# Altium PCB INC-FBTMC429-V1.pcbdoc
Units mil, origin at the board's own origin, x right, y up, seen from the top; angles counter-clockwise.
Board outline 3917.5 x 2962.5 mil, 2 copper layers (Top Layer, Bottom Layer); 58 components, 78 nets, 202 pads, 9 vias.
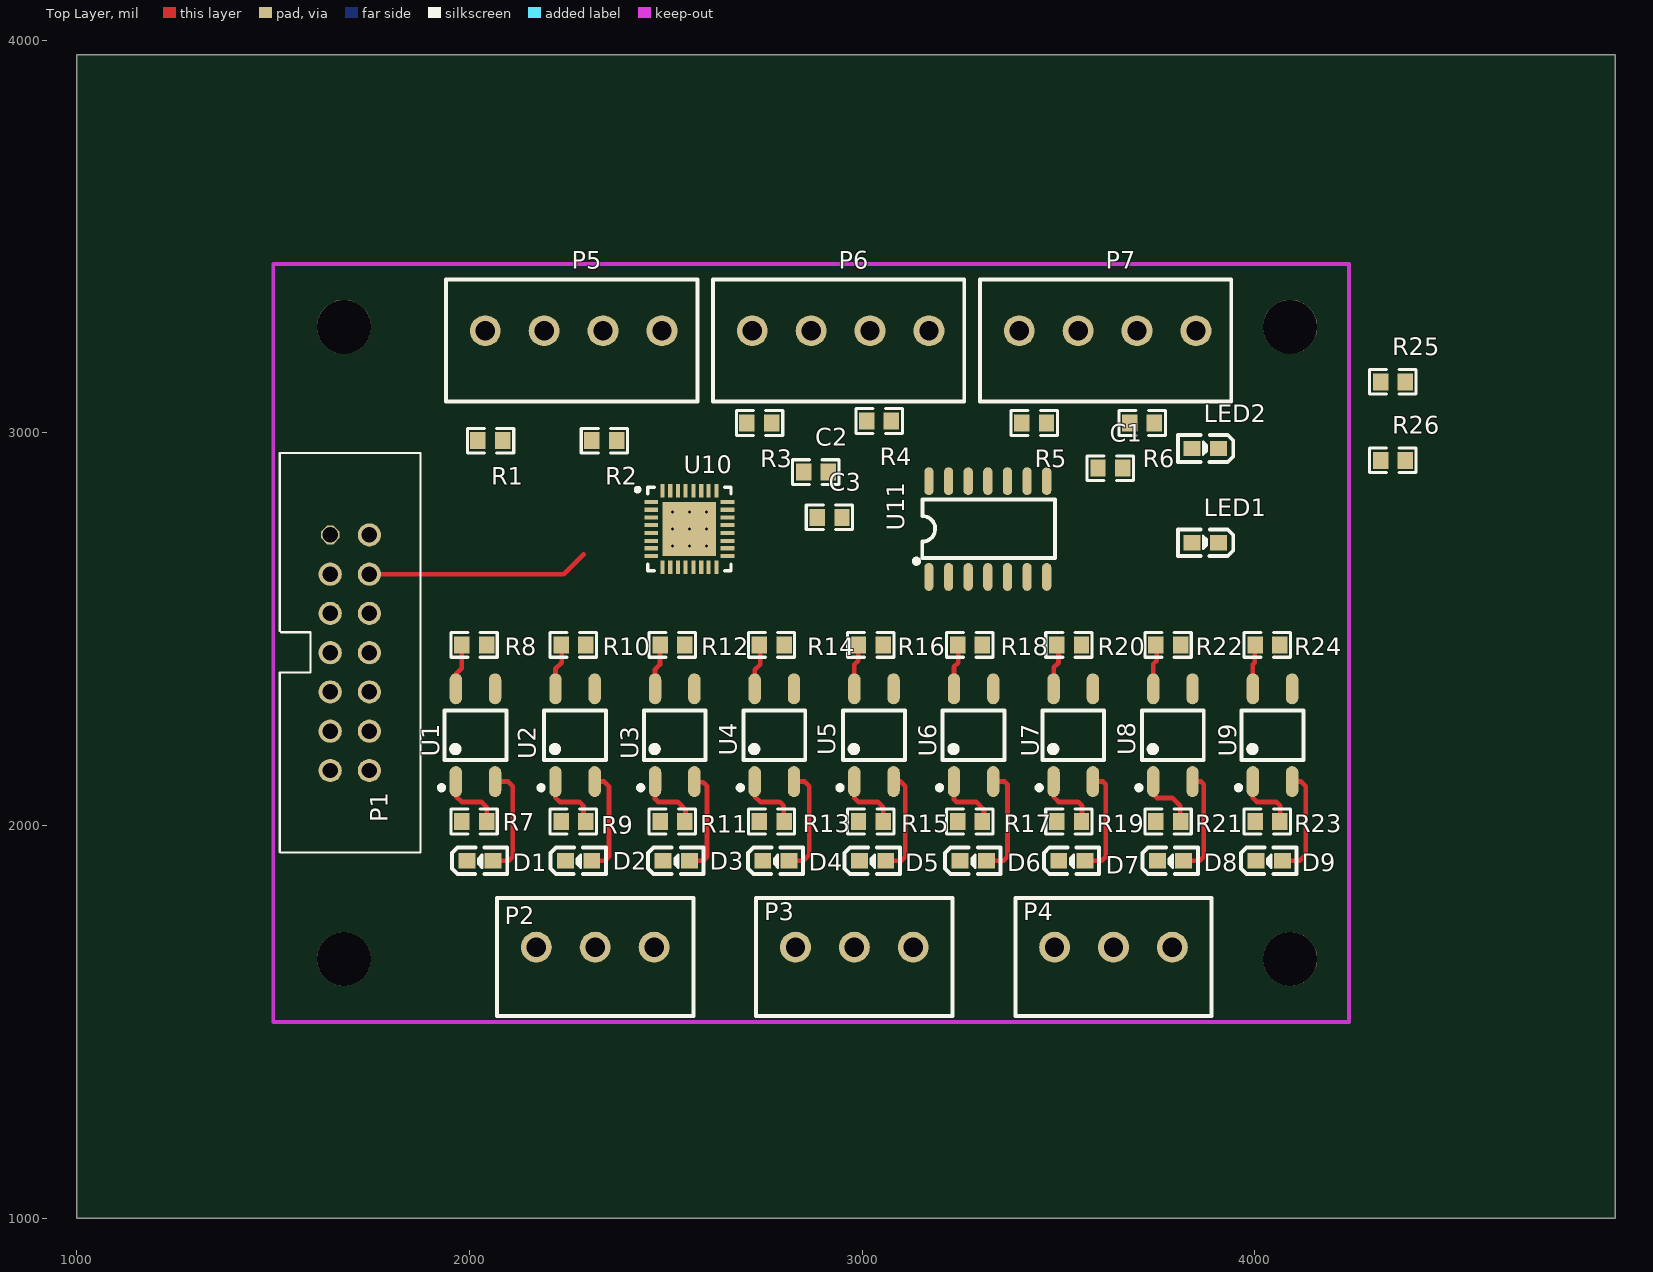
[diagram p0: Top Layer view]
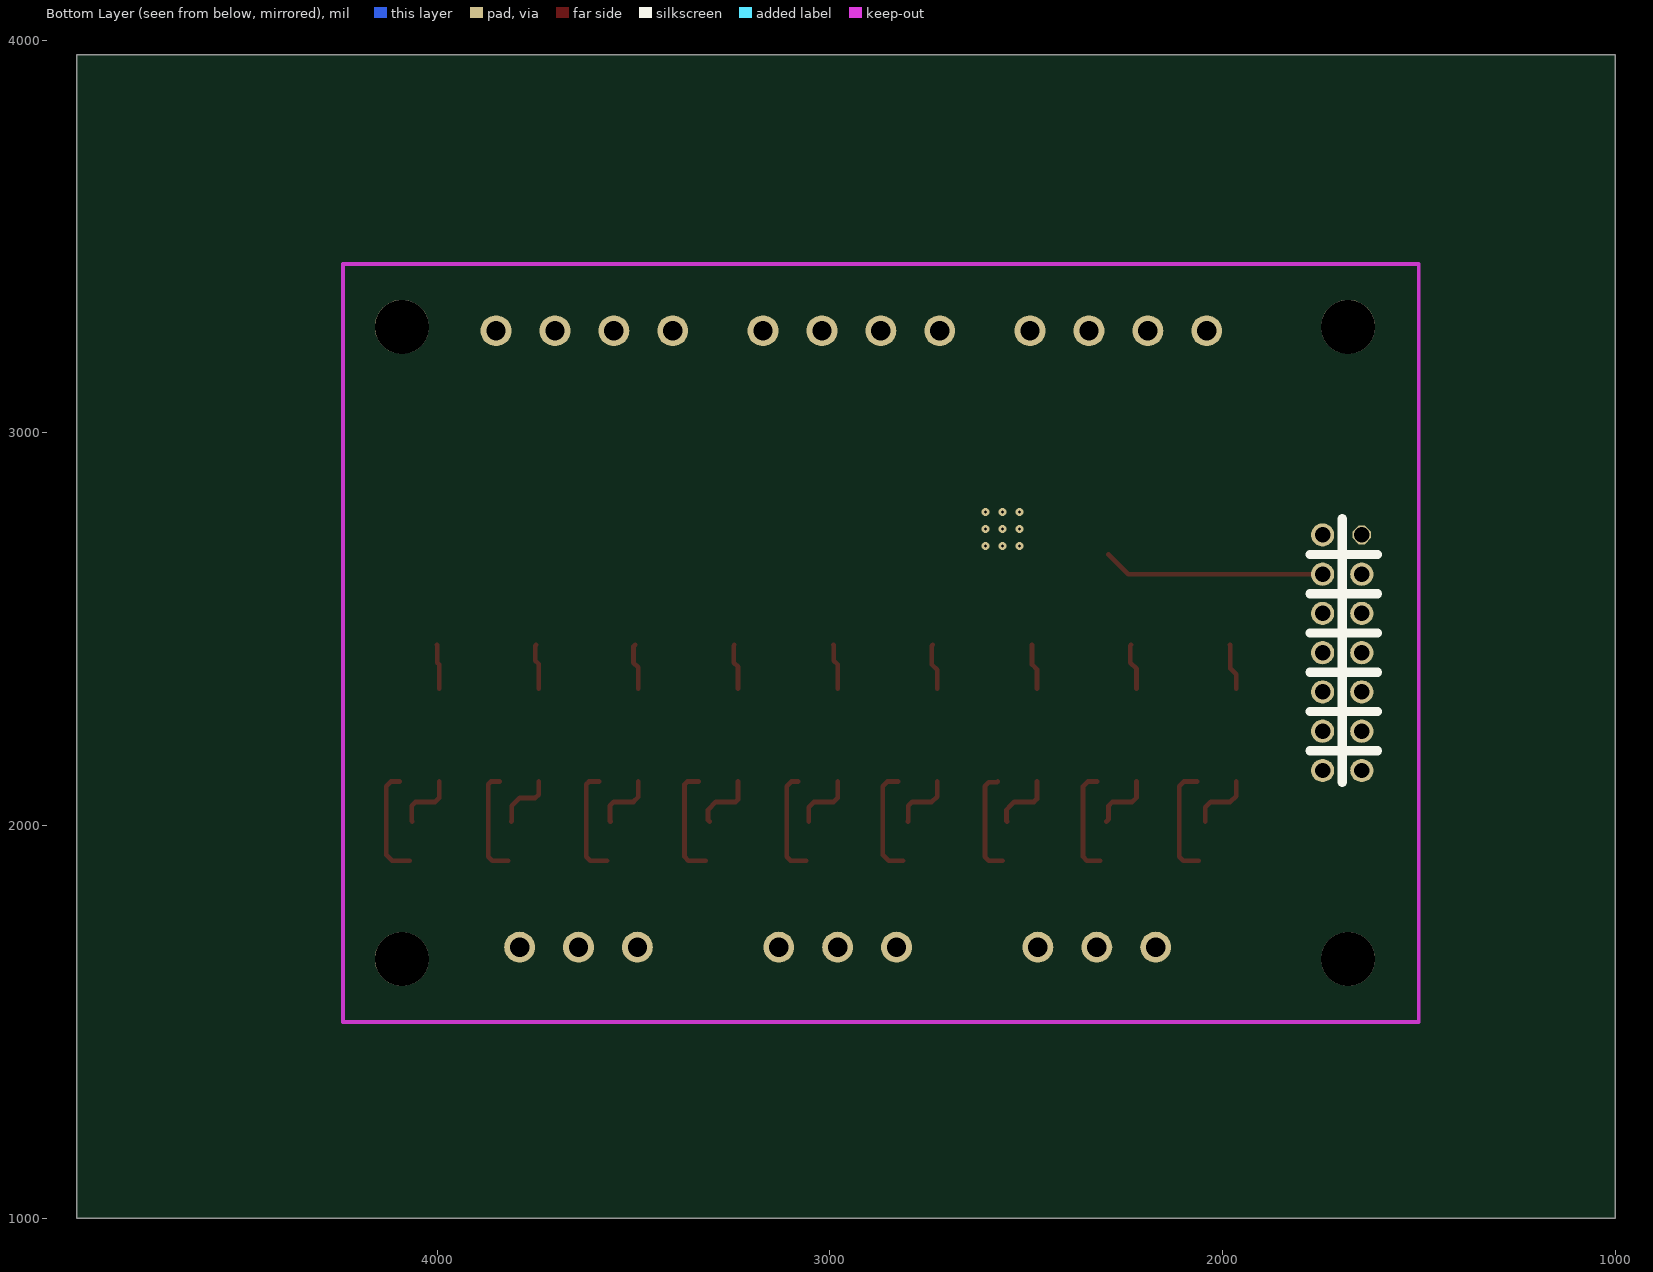
[diagram p1: Bottom Layer view, seen from below]

## Layer stack, top to bottom
Top Layer: signal copper (thickness not stored)
Dielectric: dielectric 12.6, FR-4, Dk 4.8
Bottom Layer: signal copper (thickness not stored)

## Board outline
4917.5,1000 1000,1000 1000,3962.5 4917.5,3962.5

## Components (designator, comment, footprint, x,y, rotation, side; value= is the part's Value field where it differs from the comment)
C1 "100nF" ?#1 3600,2910 r0 top
C2 "470nF" ?#1 2850,2900 r0 top
C3 "100nF" ?#1 2885,2785 r0 top
D1 "LED_0603" ?#2 2060,1910 r180 top
D2 "LED_0603" ?#2 2311.25,1910 r180 top
D3 "LED_0603" ?#2 2560,1910 r180 top
D4 "LED_0603" ?#2 2813.75,1910 r180 top
D5 "LED_0603" ?#2 3060,1910 r180 top
D6 "LED_0603" ?#2 3316.25,1910 r180 top
D7 "LED_0603" ?#2 3567.5,1910 r180 top
D8 "LED_0603" ?#2 3818.75,1910 r180 top
D9 "LED_0603" ?#2 4070,1910 r180 top
LED1 "FC-1608GEK-572E" ?#2 3840,2720 r0 top
LED2 "19-217/BHC-ZL1M2RY/3T" ?#2 3840,2960 r0 top
P1 "IDC Box2X7 2.54mm" ?#3 1745,2340 r270 top
P2 "WJ15EDGVC-3P" ?#4 2320,1665 r0 top
P3 "WJ15EDGVC-3P" ?#4 2980,1665 r0 top
P4 "WJ15EDGVC-3P" ?#4 3640,1665 r0 top
P5 "WJ15EDGVC-4P" ?#5 2260,3390 r0 top
P6 "WJ15EDGVC-4P" ?#5 2940,3390 r0 top
P7 "WJ15EDGVC-4P" ?#5 3620,3390 r0 top
R1 "470Ω" ?#1 2085,2980 r180 top
R2 "470Ω" ?#1 2375,2980 r180 top
R3 "470Ω" ?#1 2770,3025 r180 top
R4 "470Ω" ?#1 3075,3030 r180 top
R5 "470Ω" ?#1 3470,3025 r180 top
R6 "470Ω" ?#1 3745,3025 r180 top
R7 "470Ω" ?#1 1980,2010 r0 top
R8 "1KΩ" ?#1 1980,2460 r0 top
R9 "470Ω" ?#1 2232.5,2010 r0 top
R10 "1KΩ" ?#1 2232.5,2460 r0 top
R11 "470Ω" ?#1 2485,2010 r0 top
R12 "1KΩ" ?#1 2485,2460 r0 top
R13 "470Ω" ?#1 2737.5,2010 r0 top
R14 "1KΩ" ?#1 2737.5,2460 r0 top
R15 "470Ω" ?#1 2990,2010 r0 top
R16 "1KΩ" ?#1 2990,2460 r0 top
R17 "470Ω" ?#1 3242.5,2010 r0 top
R18 "1KΩ" ?#1 3242.5,2460 r0 top
R19 "470Ω" ?#1 3495,2010 r0 top
R20 "1KΩ" ?#1 3495,2460 r0 top
R21 "470Ω" ?#1 3747.5,2010 r0 top
R22 "1KΩ" ?#1 3747.5,2460 r0 top
R23 "470Ω" ?#1 4000,2010 r0 top
R24 "1KΩ" ?#1 4000,2460 r0 top
R25 "1KΩ" ?#1 4320,3130 r0 top
R26 "1KΩ" ?#1 4320,2930 r0 top
U1 "EL357N(B)(TA)-G" ?#6 1960,2110 r180 top
U2 "EL357N(B)(TA)-G" ?#6 2213.75,2110 r180 top
U3 "EL357N(B)(TA)-G" ?#6 2467.5,2110 r180 top
U4 "EL357N(B)(TA)-G" ?#6 2721.25,2110 r180 top
U5 "EL357N(B)(TA)-G" ?#6 2975,2110 r180 top
U6 "EL357N(B)(TA)-G" ?#6 3228.75,2110 r180 top
U7 "EL357N(B)(TA)-G" ?#6 3482.5,2110 r180 top
U8 "EL357N(B)(TA)-G" ?#6 3736.25,2110 r180 top
U9 "EL357N(B)(TA)-G" ?#6 3990,2110 r180 top
U10 "TMC429-LI" ?#7 2555,2750 r0 top
U11 "74HC04D,653" ?#8 3175,2650 r90 top

## Footprints (in the part's own frame and the unit in brackets; to place one, negate y for a bottom-side part, rotate by r counter-clockwise, add the part's x,y. Pads: shape width x height; smd on the part's side, far side on the other; paste and mask are expansions set on the pad)
?#1 [mm]
  rect 1x1.1 smd: 1(0.015,0) 2(1.615,0)
  silkscreen extent -0.7,-0.8 2.3,0.8
?#2 [mm]
  rect 1.092x0.991 smd: 1(0,0) 2(1.702,0)
  silkscreen extent -0.91,-0.86 2.67,0.86
?#3 [mm]
  oct 1.149x1.148 hole 1 rot 135: 1(-10.16,-2.54)
  round 1.5 hole 1: 2(-10.16,0) 3(-7.62,-2.54) 4(-7.62,0) 5(-5.08,-2.54) 6(-5.08,0) 7(-2.54,-2.54) 8(-2.54,0) 9(0,-2.54) 10(0,0) 11(2.54,-2.54) 12(2.54,0) 13(5.08,-2.54) 14(5.08,0)
  silkscreen extent -15.46,-5.8 10.38,3.3
?#4 [mm]
  round 2 hole 1.25: 1(-3.81,0.635) 2(0,0.635) 3(3.81,0.635)
  silkscreen extent -6.35,-3.81 6.35,3.81
?#5 [mm]
  round 2 hole 1.25: 1(-5.588,-3.302) 2(-1.778,-3.302) 3(2.032,-3.302) 4(5.842,-3.302)
  silkscreen extent -8.13,-7.87 8.13,0
?#6 [mm]
  oval 0.8x2 smd: 1(-0.127,-0.048) 2(-2.667,-0.048) 3(-2.667,-6.048) 4(-0.127,-6.048)
  silkscreen extent -3.4,-4.65 0.95,0.5
?#7 [mm]
  rect 0.876x0.267 smd: 1(-2.337,1.88) 2(-2.337,1.372) 3(-2.337,0.864) 4(-2.337,0.381) 5(-2.337,-0.127) 6(-2.337,-0.635) 7(-2.337,-1.118) 8(-2.337,-1.626) 17(2.591,-1.626) 18(2.591,-1.118) 19(2.591,-0.635) 20(2.591,-0.127) 21(2.591,0.381) 22(2.591,0.864) 23(2.591,1.372) 24(2.591,1.88)
  rect 0.267x0.876 smd: 9(-1.626,-2.337) 10(-1.118,-2.337) 11(-0.61,-2.337) 12(-0.127,-2.337) 13(0.381,-2.337) 14(0.889,-2.337) 15(1.372,-2.337) 16(1.88,-2.337) 25(1.88,2.591) 26(1.372,2.591) 27(0.889,2.591) 28(0.381,2.591) 29(-0.127,2.591) 30(-0.61,2.591) 31(-1.118,2.591) 32(-1.626,2.591)
  rect 3.467x3.467 smd: 33(0.127,0.127)
  silkscreen extent -3.35,-2.57 2.83,2.83
?#8 [mm]
  oval 1.8x0.6 smd: 1(-0.432,0.127) 2(-0.432,-1.143) 3(-0.432,-2.413) 4(-0.432,-3.683) 5(-0.432,-4.953) 6(-0.432,-6.223) 7(-0.432,-7.493) 8(5.766,-7.493) 9(5.766,-6.223) 10(5.766,-4.953) 11(5.766,-3.683) 12(5.766,-2.413) 13(5.766,-1.143) 14(5.766,0.127)
  silkscreen extent 0.44,-8.03 4.57,1.09

## Free pads (board coordinates)
  round 137.8 hole 137.8 unplated: ""(1680,1660) ""(1680,3270) ""(4090,1660) ""(4090,3270)

## Via types
v1: diameter 19.7, hole 7.9, Top Layer to Bottom Layer, 9 vias

## Nets (pads, with @x,y where several pads share a name; then routed paths per layer and width w, separated by ;. In a path a pad name is that pad's centre, name@x,y a point inside that pad or via, vN(x,y) a via of type N, cw(c..) or ccw(c..) an arc to the next point about the centre after c; other vN are vias at no path point)
+3.3V: C2.2 C3.2 P1.6 R8.2 R10.2 R12.2 R14.2 R16.2 R18.2 R20.2 R22.2 R24.2 R25.1 U10.3 U10.21 U10.22
+5V: C1.2 P1.8 R7.1 R9.1 R11.1 R13.1 R15.1 R17.1 R19.1 R21.1 R23.1 U11.14
D1: U10.17 U11.11
D1+: R2.1 U11.10
D2: U10.27 U11.13
D2+: R4.1 U11.12
D3: U10.20 U11.1
D3+: R6.1 U11.2
GND: C1.1 C2.1 C3.1 LED2.2 P1.7 P5.2 P5.4 P6.2 P6.4 P7.2 P7.4 U1.3 U2.3 U3.3 U4.3 U5.3 U6.3 U7.3 U8.3 U9.3 U10.4 U10.6 U10.23 U10.25 U10.33 U11.7
L1: D1.2 P2.1
L2: D4.2 P3.1
L3: D7.2 P4.1
LED1_1: LED1.1 R25.2
O1: D2.2 P2.2
O2: D5.2 P3.2
O3: D8.2 P4.2
P1+: R1.1 U11.8
P1_1: P1.1
P1_9: P1.9
P1_10: P1.10
P2+: R3.1 U11.6
P3+: R5.1 U11.4
P5_1: P5.1 R1.2
P5_3: P5.3 R2.2
P6_1: P6.1 R3.2
P6_3: P6.3 R4.2
P7_1: P7.1 R5.2
P7_3: P7.3 R6.2
PC1_ORG1: P1.2 R10.1 U2.4 | length 119.4
  Top Layer w12: U2.4 2218.75,2398.75 2235,2415 2235,2458.09 R10.1
PC1_ORG3: R22.1 U8.4 | length 116.3
  Top Layer w12: U8.4 3741.25,2411.25 3750,2420 3750,2458.1 R22.1
PC2_ORG2: P1.13 R16.1 U5.4 | length 116.3
  Top Layer w12: U5.4 2980,2410 2990,2420 2990,2459.38 R16.1
PC3_ORG3: P1.14
R1: D3.2 P2.3
R2: D6.2 P3.3
R3: D9.2 P4.3
R26_1: LED2.1 R26.1
REF1: R8.1 U1.4 U10.31 | length 118.4
  Top Layer w12: U1.4 1965,2385 1980,2400 1980,2459.39 R8.1
REF2: R14.1 U4.4 U10.1 | length 118.4
  Top Layer w12: U4.4 2726.25,2396.25 2740,2410 2740,2458.09 R14.1
REF3: R20.1 U7.4 U10.2 | length 118.9
  Top Layer w12: U7.4 3487.5,2402.5 3500,2415 3500,2455.6 R20.1
REFR1: R12.1 U3.4 U10.28 | length 117.3
  Top Layer w12: U3.4 2472.5,2397.5 2485,2410 2485,2459.39 R12.1
REFR2: R18.1 U6.4 U10.13 | length 117.3
  Top Layer w12: U6.4 3233.75,2403.75 3245,2415 3245,2458.1 R18.1
REFR3: R24.1 U9.4 U10.29 | length 114.2
  Top Layer w12: U9.4 3995,2410 4000,2415 4000,2459.38 R24.1
S1: U10.15 U11.9
S2: U10.18 U11.5
S3: U10.19 U11.3
S$67: 
S$69: 
SPI_CLK: P1.3 U10.8
SPI_CS: P1.4 U10.7 | length 565.7
  Top Layer w12: P1.4 2240,2640 2290,2690
SPI_MISO: P1.12 U10.12
SPI_MOSI: P1.11 U10.10
TIM_PWM: P1.5 U10.5
U1_1: R7.2 U1.1 | length 163.7
  Top Layer w12: U1.1 1965,2075 1980,2060 2030,2060 2043.6,2046.4 R7.2
U1_2: D1.1 U1.2 | length 284.1
  Top Layer w12: D1.1 2100,1910 2110,1920 2110,2100 2098.1,2111.9 U1.2
U2_1: R9.2 U2.1 | length 163.2
  Top Layer w12: U2.1 2218.75,2071.25 2230,2060 2270,2060 2280,2060 2290,2050 2290,2016.08 R9.2
U2_2: D2.1 U2.2 | length 269
  Top Layer w12: D2.1@2311.3,1910 2345,1910 2355,1920 2355,2100 2343.1,2111.9 U2.2
U3_1: R11.2 U3.1 | length 163.9
  Top Layer w12: U3.1 2472.5,2067.5 2480,2060 2520,2060 2530,2060 2540,2050 2550,2040 2550,2011.4 R11.2
U3_2: D3.1 U3.2 | length 266.6
  Top Layer w12: D3.1 2595,1910 2605,1920 2605,2100 2595,2110 2574.4,2110 U3.2
U4_1: R13.2 U4.1 | length 162.2
  Top Layer w12: U4.1 2726.25,2073.75 2740,2060 2760,2060 2790,2060 2800,2050 2800,2011.08 R13.2
U4_2: D4.1 U4.2 | length 276.1
  Top Layer w12: D4.1 2850,1910 2865,1925 2865,2100 2853.1,2111.9 U4.2
U5_1: R15.2 U5.1 | length 161.7
  Top Layer w12: U5.1 2980,2070 2990,2060 3040,2060 3053.59,2046.41 R15.2
U5_2: D5.1 U5.2 | length 269.1
  Top Layer w12: D5.1 3100,1910 3110,1920 3110,2100 3098.1,2111.9 U5.2
U6_1: R17.2 U6.1 | length 164.4
  Top Layer w12: U6.1 3233.75,2066.25 3240,2060 3290,2060 3310,2040 3310,2013.9 R17.2
U6_2: D6.1 U6.2 | length 282
  Top Layer w12: D6.1 3360,1910 3370,1920 3370,2105 3363.1,2111.9 U6.2
U7_1: R19.2 U7.1 | length 161.8
  Top Layer w12: U7.1 3487.5,2072.5 3500,2060 3550,2060 3560,2050 3560,2011.4 R19.2
U7_2: D7.1 U7.2 | length 277
  Top Layer w12: D7.1 3610,1910 3620,1920 3620,2105 3613.1,2111.9 U7.2
U8_1: R21.2 U8.1 | length 154.3
  Top Layer w12: U8.1 3741.25,2078.75 3750,2070 3790,2070 3810,2050 3810,2011.08 R21.2
U8_2: D8.1 U8.2 | length 272
  Top Layer w12: D8.1 3860,1910 3870,1920 3870,2105 3863.1,2111.9 U8.2
U9_1: R23.2 U9.1 | length 160.8
  Top Layer w12: U9.1 3995,2070 4005,2060 4040,2060 4055,2060 4065,2050 4065,2011.4 R23.2
U9_2: D9.1 U9.2 | length 281.1
  Top Layer w12: D9.1 4115,1910 4130,1925 4130,2100 4118.1,2111.9 U9.2
U10_9: U10.9
U10_11: U10.11
U10_14: LED1.2 U10.14
U10_16: U10.16
U10_24: U10.24
U10_26: U10.26
U10_30: R26.2 U10.30
U10_32: U10.32
copper on no net:
  other v1: 2516.7,2711.7 2560,2711.7 2603.3,2711.7 2516.7,2755 2560,2755 2603.3,2755 2516.7,2798.3 2560,2798.3 2603.3,2798.3